# Altium PCB 1_SPDIF_PCB_V1x4.PcbDoc (part 2 of 2)
Units mm, origin at the board's own origin, x right, y up, seen from the top; angles counter-clockwise.
Board outline 60 x 60 mm, 4 copper layers (Top Layer, Mid-Top Layer, Mid-Bot Layer, Bottom Layer), stack 1.543 mm thick; 67 components, 68 nets, 241 pads, 109 vias.
Unrouted connection lines stored in the file: 1.
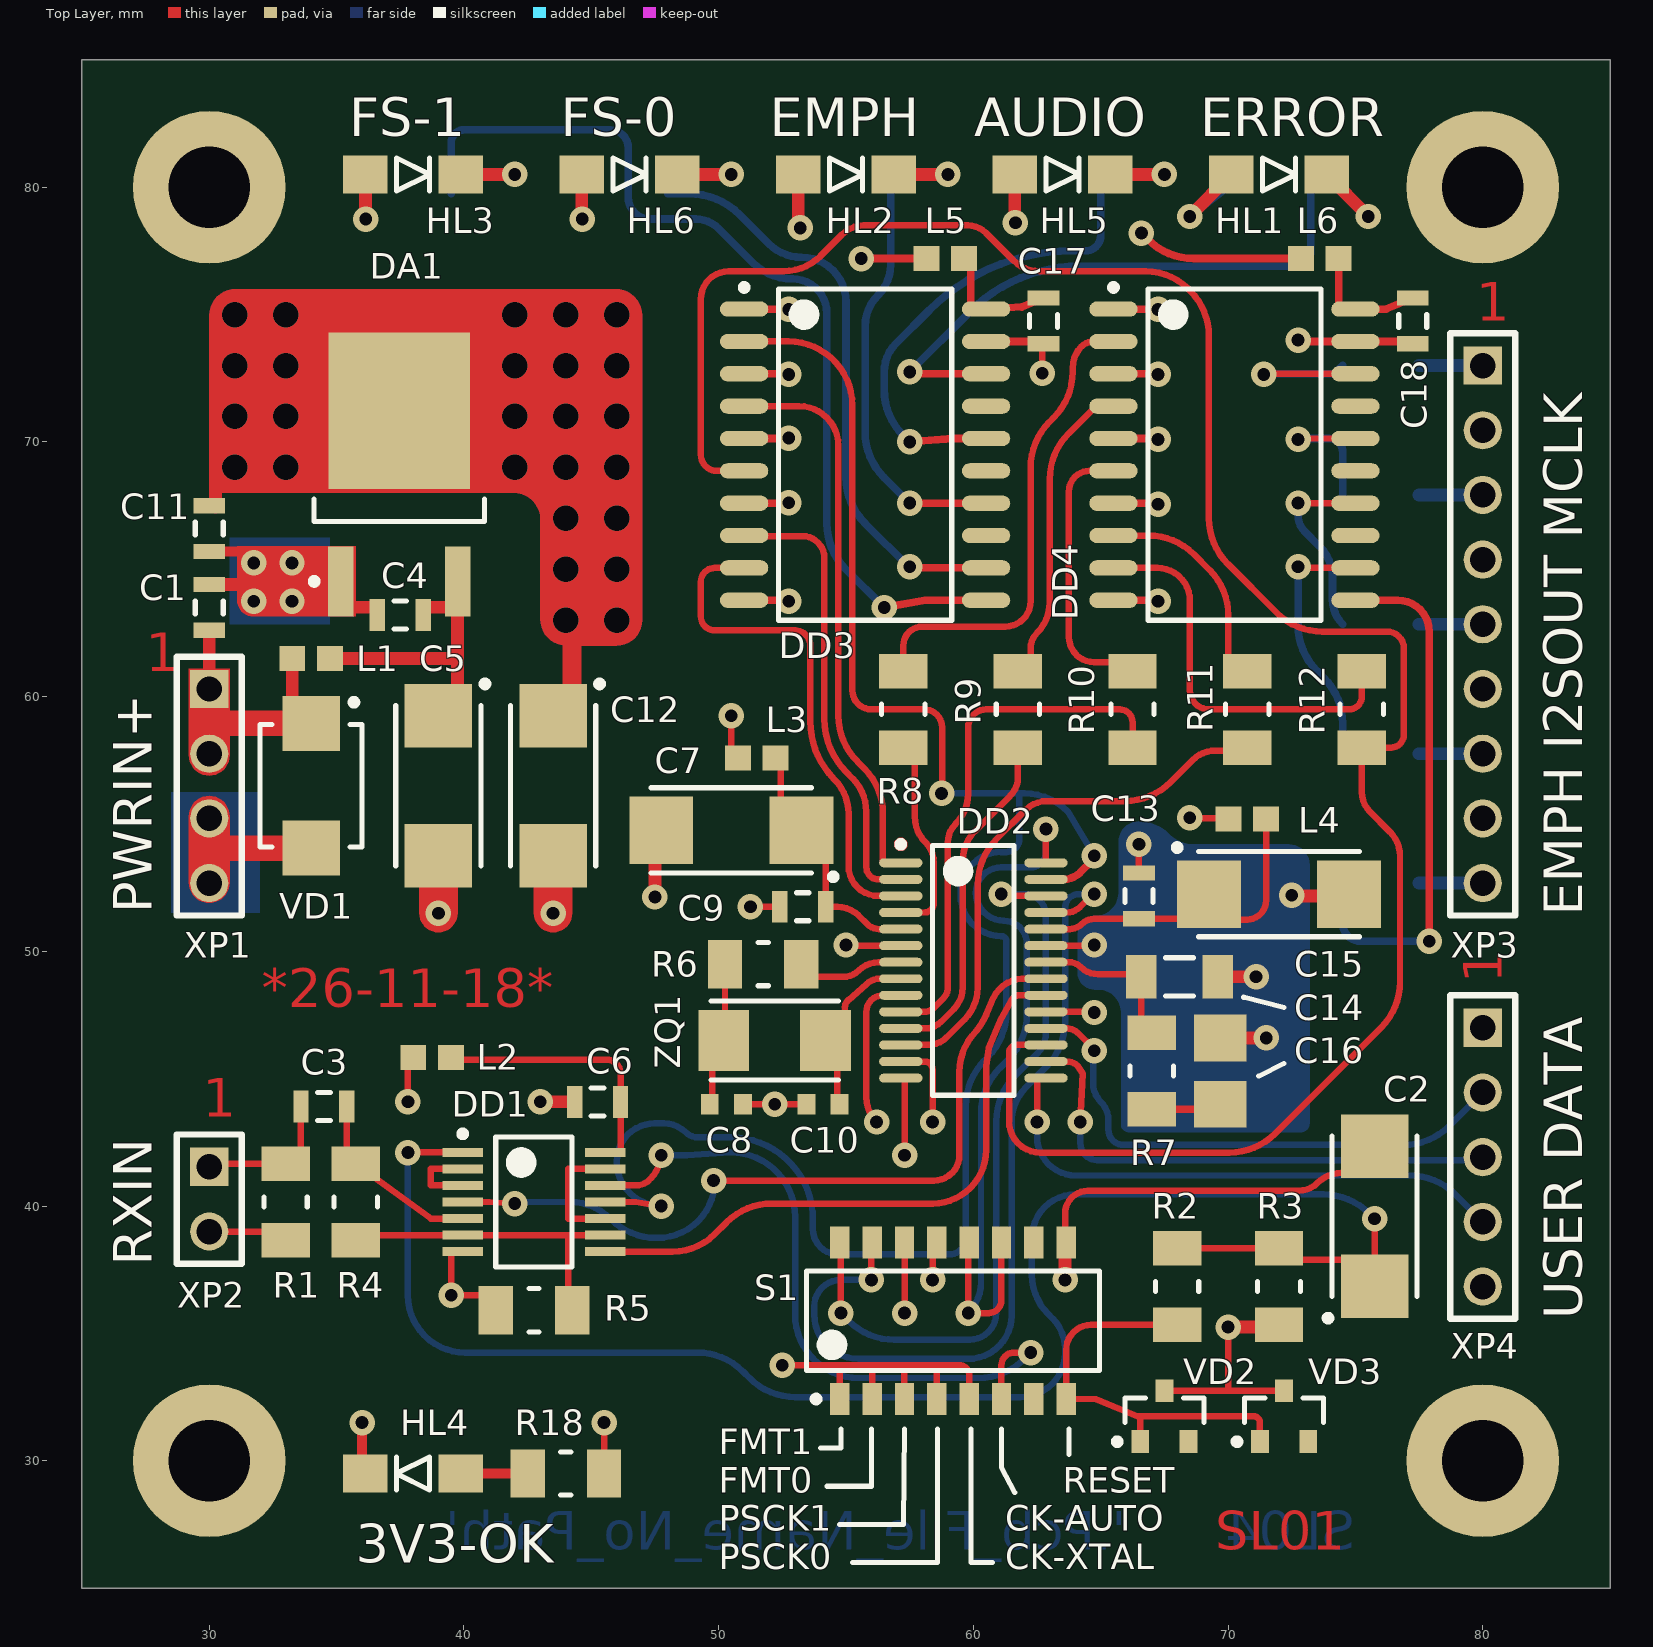
[diagram p0: Top Layer view]

## Polygon pours and split planes (outlines as drawn) (continued)
GND on Bottom Layer "GND_L04_P022" (solid, remove dead copper, pour order 22): 84,76.75 64.75,76.75 ccw(c64.75,75.75) 63.75,75.75 63.75,72.75 cw(c62.75,72.75) 62.75,71.75 55.5,71.75 ccw(c55.5,70.75) 54.5,70.75 54.5,61 cw(c53.5,61) 53.5,60 50.5,60 ccw(c50.5,59.25) 49.75,59.25 49.75,59 26,59 26,71 29,71 29,69 ccw(c31,69) 31,67 41.75,67 cw(c41.75,66.75) 42,66.75 42,63 ccw(c44,63) 44,61 46,61 ccw(c46,63) 48,63 48,75 ccw(c46,75) 46,77 31,77 ccw(c31,75) 29,75 29,71 26,71 26,84 84,84
GND on Bottom Layer "GND_L04_P020" (solid, remove dead copper, pour order 20): 18.5,50.7
3V3 on Mid-Bot Layer "3V3_L03_P026" (solid, remove dead copper, pour order 26): 26,84 26,26 84,26 84,84

## Other copper
Top Layer:
  region net GND: 30,56.1 cw(c30,55.3) 30.8,55.3 30.8,52.7 cw(c30,52.7) 30,51.9 cw(c30,52.7) 29.2,52.7 29.2,55.3 cw(c30,55.3)
  region net PWR-IN: 29.2,61.1 29.2,57.7 ccw(c30,57.7) 30,56.9 ccw(c30,57.7) 30.8,57.7 30.8,61.1
  region net GND: 44.25,51.5 cw(c43.5,51.5) 43.5,50.75 cw(c43.5,51.5) 42.75,51.5 42.75,52.825 44.25,52.825
  region net GND: 39.75,51.5 cw(c39,51.5) 39,50.75 cw(c39,51.5) 38.25,51.5 38.25,52.825 39.75,52.825
  region net 3V3: 31.041,76 ccw(c31.041,74.959) 30,74.959 30,68 41.959,68 cw(c41.959,66.959) 43,66.959 43,63.041 ccw(c44.041,63.041) 44.041,62 46,62 ccw(c46,63) 47,63 47,74.959 ccw(c45.959,74.959) 45.959,76
  region net GND: 35.75,63.15 31.735,63.15 cw(c31.735,63.785) 31.1,63.785 31.1,65.9 35.75,65.9
  region: 39,50.875
  region: 39,50.875
  region: 32,77.2
  region: 26.95,74.175
  text "1" at 79.75,74.75 h1.5
  text "1" at 27.5,61 h1.5
  text "1" at 80.75,48.75 h1.5 r90
  text "*26-11-18*" at 32.064,47.8 h1.5
  text "1" at 29.75,43.5 h1.5
  text "SL01" at 69.5,26.5 h1.5
Mid-Top Layer:
  rectangle net GND: 28.5,51 31.5,56.5
  rectangle net GND: 30.675,62.787 34.25,66.25
  region net GND: 64.8,51.4 64.4,51.4 cw(c64.4,52.3) 63.5,52.3 63.5,52.8 62.7,52.8 62.7,47.4 63.5,47.4 63.5,47.6 cw(c64.4,47.6) 64.4,48.5 64.8,48.5
  region net GND: 44,61 cw(c44,63) 42,63 41.5,63 41.5,61
  region net GND: 64.1,49.15 ccw(c64.75,49.15) 64.75,48.5 64.9,48.5 cw(c64.9,47.6) 65.8,47.6 65.8,43.2 ccw(c66.1,43.2) 66.1,42.9 72.856,42.9 ccw(c72.856,43.244) 73.2,43.244 73.2,53.4 ccw(c72.4,53.4) 72.4,54.2 68.666,54.2 cw(c68.666,55.566) 67.7,54.6 ccw(c66.496,53.402) 66.5,55.1 ccw(c66.5,54.3) 65.7,54.3 65.7,52.3 cw(c64.8,52.3) 64.8,51.4 ccw(c64.8,50.7) 64.1,50.7
  region net 3V3: 31.041,76 ccw(c31.041,74.959) 30,74.959 30,69.041 ccw(c31.041,69.041) 31.041,68 41.959,68 cw(c41.959,66.959) 43,66.959 43,63.041 ccw(c44.041,63.041) 44.041,62 46,62 ccw(c46,63) 47,63 47,74.959 ccw(c45.959,74.959) 45.959,76
  text "SL02" at 69.5,26.5 h1.5
Mid-Bot Layer:
  region net 3V3: 31.041,76 ccw(c31.041,74.959) 30,74.959 30,69.041 ccw(c31.041,69.041) 31.041,68 41.959,68 cw(c41.959,66.959) 43,66.959 43,63.041 ccw(c44.041,63.041) 44.041,62 46,62 ccw(c46,63) 47,63 47,74.959 ccw(c45.959,74.959) 45.959,76
  text "SL03" at 75,26.5 h1.5
Bottom Layer:
  rectangle net GND: 28.5,51.5 32,56.25
  rectangle net GND: 30.804,62.831 34.75,66.25
  region net GND: 64.1,49.15 ccw(c64.75,49.15) 64.75,48.5 64.9,48.5 cw(c64.9,47.6) 65.8,47.6 65.8,43.2 ccw(c66.1,43.2) 66.1,42.9 72.856,42.9 ccw(c72.856,43.244) 73.2,43.244 73.2,53.4 ccw(c72.4,53.4) 72.4,54.2 68.666,54.2 cw(c68.666,55.566) 67.7,54.6 ccw(c66.496,53.402) 66.5,55.1 ccw(c66.5,54.3) 65.7,54.3 65.7,52.3 cw(c64.8,52.3) 64.8,51.4 ccw(c64.8,50.7) 64.1,50.7
  region net 3V3: 31.041,76 ccw(c31.041,74.959) 30,74.959 30,69.041 ccw(c31.041,69.041) 31.041,68 41.959,68 cw(c41.959,66.959) 43,66.959 43,63.041 ccw(c44.041,63.041) 44.041,62 46,62 ccw(c46,63) 47,63 47,74.959 ccw(c45.959,74.959) 45.959,76
  region net GND: 64.25,50.225
  text "'.Pcb_File_Name_No_Path'" at 66,26.5 h1.5
  text "SL04" at 75,26.5 h1.5

## Silkscreen, mask and mechanical layers (free items; w line width, h text height)
Top Overlay:
  lines w0.2: 54,30.5 54.8,30.5 54.8,31.25 ; 54.25,29 56,29 56,31.25 ; 54.75,27.5 57.25,27.5 57.3,31.25 ; 55.25,26 58.6,26 58.6,31.25 ; 59.9,31.25 59.9,26 60.75,26 ; 61.1,31.25 61.1,29.75 61.625,28.75 ; 63.75,30.25 63.75,31.25 ; 70.6,48.2 72.2,47.8 ; 71.2,45.1 72.2,45.6
  text "FS-1" at 35.5,82 h1.5
  text "FS-0" at 43.8,82 h1.5
  text "EMPH" at 52,82 h1.5
  text "AUDIO" at 60.04,82 h1.5
  text "ERROR" at 68.9,82 h1.5
  text "PWRIN+" at 27.75,51.5 h1.5 r90
  text "EMPH I2SOUT MCLK" at 83.9,51.4 h1.5 r90
  text "RXIN" at 27.75,37.66 h1.5 r90
  text "USER DATA" at 83.9,35.56 h1.5 r90
  text "FMT1" at 50,30.25 h1
  text "FMT0" at 50,28.75 h1
  text "RESET" at 63.5,28.75 h1
  text "PSCK1" at 50,27.25 h1
  text "CK-AUTO" at 61.25,27.25 h1
  text "3V3-OK" at 35.75,26 h1.5
  text "PSCK0" at 50,25.75 h1
  text "CK-XTAL" at 61.25,25.75 h1
Top Solder:
  rectangle: 27.25,60.75 28.25,62.75
  rectangle: 29.5,43.25 30.5,45.25
  region: 81,48.5 81,49.5 79,49.5 79,48.5
  rectangle: 79.5,74.5 80.5,76.5
  region: 31.041,76 ccw(c31.041,74.959) 30,74.959 30,69.041 ccw(c31.041,69.041) 31.041,68 41.959,68 cw(c41.959,66.959) 43,66.959 43,63.041 ccw(c44.041,63.041) 44.041,62 46,62 ccw(c46,63) 47,63 47,74.959 ccw(c45.959,74.959) 45.959,76
Drill Drawing:
  circle w0.254: c193.849,38.86 r0.847
  lines w0.254: 193.002,32.087 194.696,32.087 193.849,30.394 193.002,32.087 ; 193.002,34.204 194.696,34.204 194.696,35.897 193.002,35.897 193.002,34.204
  lines w0.381: 101.191,50.524 111.602,50.524 135.218,50.524 157.056,50.524 173.562,50.524 ; 101.191,53.572 111.602,53.572 135.218,53.572 157.056,53.572 173.562,53.572 ; 101.191,56.62 111.602,56.62 135.218,56.62 157.056,56.62 173.562,56.62 ; 101.191,59.668 111.602,59.668 135.218,59.668 157.056,59.668 173.562,59.668 ; 101.191,62.716 111.602,62.716 135.218,62.716 157.056,62.716 173.562,62.716 ; 101.191,65.764 111.602,65.764 135.218,65.764 157.056,65.764 173.562,65.764 ; 101.191,68.812 111.602,68.812 135.218,68.812 157.056,68.812 173.562,68.812 ; 101.191,71.86 111.602,71.86 135.218,71.86 157.056,71.86 173.562,71.86 ; 101.191,74.908 111.602,74.908 135.218,74.908 157.056,74.908 173.562,74.908 ; 101.191,77.956 111.602,77.956 135.218,77.956 157.056,77.956 173.562,77.956 ; 101.191,81.004 173.562,81.004 ; 101.441,29.251 223.987,29.251 ; 101.441,40.681 223.987,40.681 ; 111.602,84.052 111.602,47.476 ; 117.566,25.441 117.566,44.491 ; 135.218,84.052 135.218,47.476 ; 135.899,25.441 135.899,44.491 ; 154.538,25.441 154.538,44.491 ; 157.056,84.052 157.056,47.476 ; 192.627,25.441 192.627,44.491 ; 111.602,47.476 135.218,47.476 ; 111.602,47.476 101.191,47.476 101.191,84.052 173.562,84.052 173.562,47.476 157.056,47.476 ; 135.218,47.476 157.056,47.476 ; 101.441,25.441 223.987,25.441 223.987,44.491 101.441,44.491 101.441,25.441
  text "S/PDIF, 96-kHz, 24-Bit Digital Audio Interface Receiver Board" at 33.75,94.25 h2
  text "Layer" at 102.969,81.766 h1.52
  text "Name" at 113.38,81.766 h1.52
  text "Material" at 136.996,81.766 h1.52
  text "Thickness" at 158.834,81.766 h1.52
  text "Top Overlay" at 113.38,78.718 h1.52
  text "Top Solder" at 113.38,75.67 h1.52
  text "Solder Resist" at 136.996,75.67 h1.52
  text "0,010mm" at 158.834,75.67 h1.52
  text "1" at 102.969,72.622 h1.52
  text "Top Layer" at 113.38,72.622 h1.52
  text "Copper" at 136.996,72.622 h1.52
  text "0,036mm" at 158.834,72.622 h1.52
  text "Prepreg Top" at 113.38,69.574 h1.52
  text "FR-4" at 136.996,69.574 h1.52
  text "0,200mm" at 158.834,69.574 h1.52
  text "2" at 102.969,66.526 h1.52
  text "Mid-Top Layer" at 113.38,66.526 h1.52
  text "Copper" at 136.996,66.526 h1.52
  text "0,036mm" at 158.834,66.526 h1.52
  text "Core" at 113.38,63.478 h1.52
  text "1,000mm" at 158.834,63.478 h1.52
  text "3" at 102.969,60.43 h1.52
  text "Mid-Bot Layer" at 113.38,60.43 h1.52
  text "Copper" at 136.996,60.43 h1.52
  text "0,036mm" at 158.834,60.43 h1.52
  text "Prepreg Bot" at 113.38,57.382 h1.52
  text "0,200mm" at 158.834,57.382 h1.52
  text "4" at 102.969,54.334 h1.52
  text "Bottom Layer" at 113.38,54.334 h1.52
  text "Copper" at 136.996,54.334 h1.52
  text "0,036mm" at 158.834,54.334 h1.52
  text "Bottom Solder" at 113.38,51.286 h1.52
  text "Solder Resist" at 136.996,51.286 h1.52
  text "0,010mm" at 158.834,51.286 h1.52
  text "Bottom Overlay" at 113.38,48.238 h1.52
  text "Count" at 103.727,41.824 h1.83
  text "Hole Size" at 118.709,41.824 h1.83
  text "Hole Type" at 137.042,41.824 h1.83
  text "Drill Layer Pair" at 155.681,41.824 h1.83
  text "Symbol" at 193.77,41.824 h1.83
  text "4" at 103.727,38.014 h1.52
  text "3,200mm" at 118.709,38.014 h1.52
  text "Round" at 137.042,38.014 h1.52
  text "Top Layer - Bottom Layer" at 155.681,38.014 h1.52
  text "46" at 103.727,34.204 h1.52
  text "1,000mm" at 118.709,34.204 h1.52
  text "Round" at 137.042,34.204 h1.52
  text "Top Layer - Bottom Layer" at 155.681,34.204 h1.52
  text "83" at 103.727,30.394 h1.52
  text "0,500mm" at 118.709,30.394 h1.52
  text "Round" at 137.042,30.394 h1.52
  text "Top Layer - Bottom Layer" at 155.681,30.394 h1.52
  text "133 Total" at 103.727,26.584 h1.52
Board Outline:
  the board outline again, w0.1